# Altium PCB JTAG_to_HDMI.PcbDoc
Units mm, origin at the board's own origin, x right, y up, seen from the top; angles counter-clockwise.
Board outline 29.8 x 34.5 mm, 2 copper layers (Top Layer, Bottom Layer), stack 1.671 mm thick; 3 components, 7 nets, 47 pads, 0 vias.
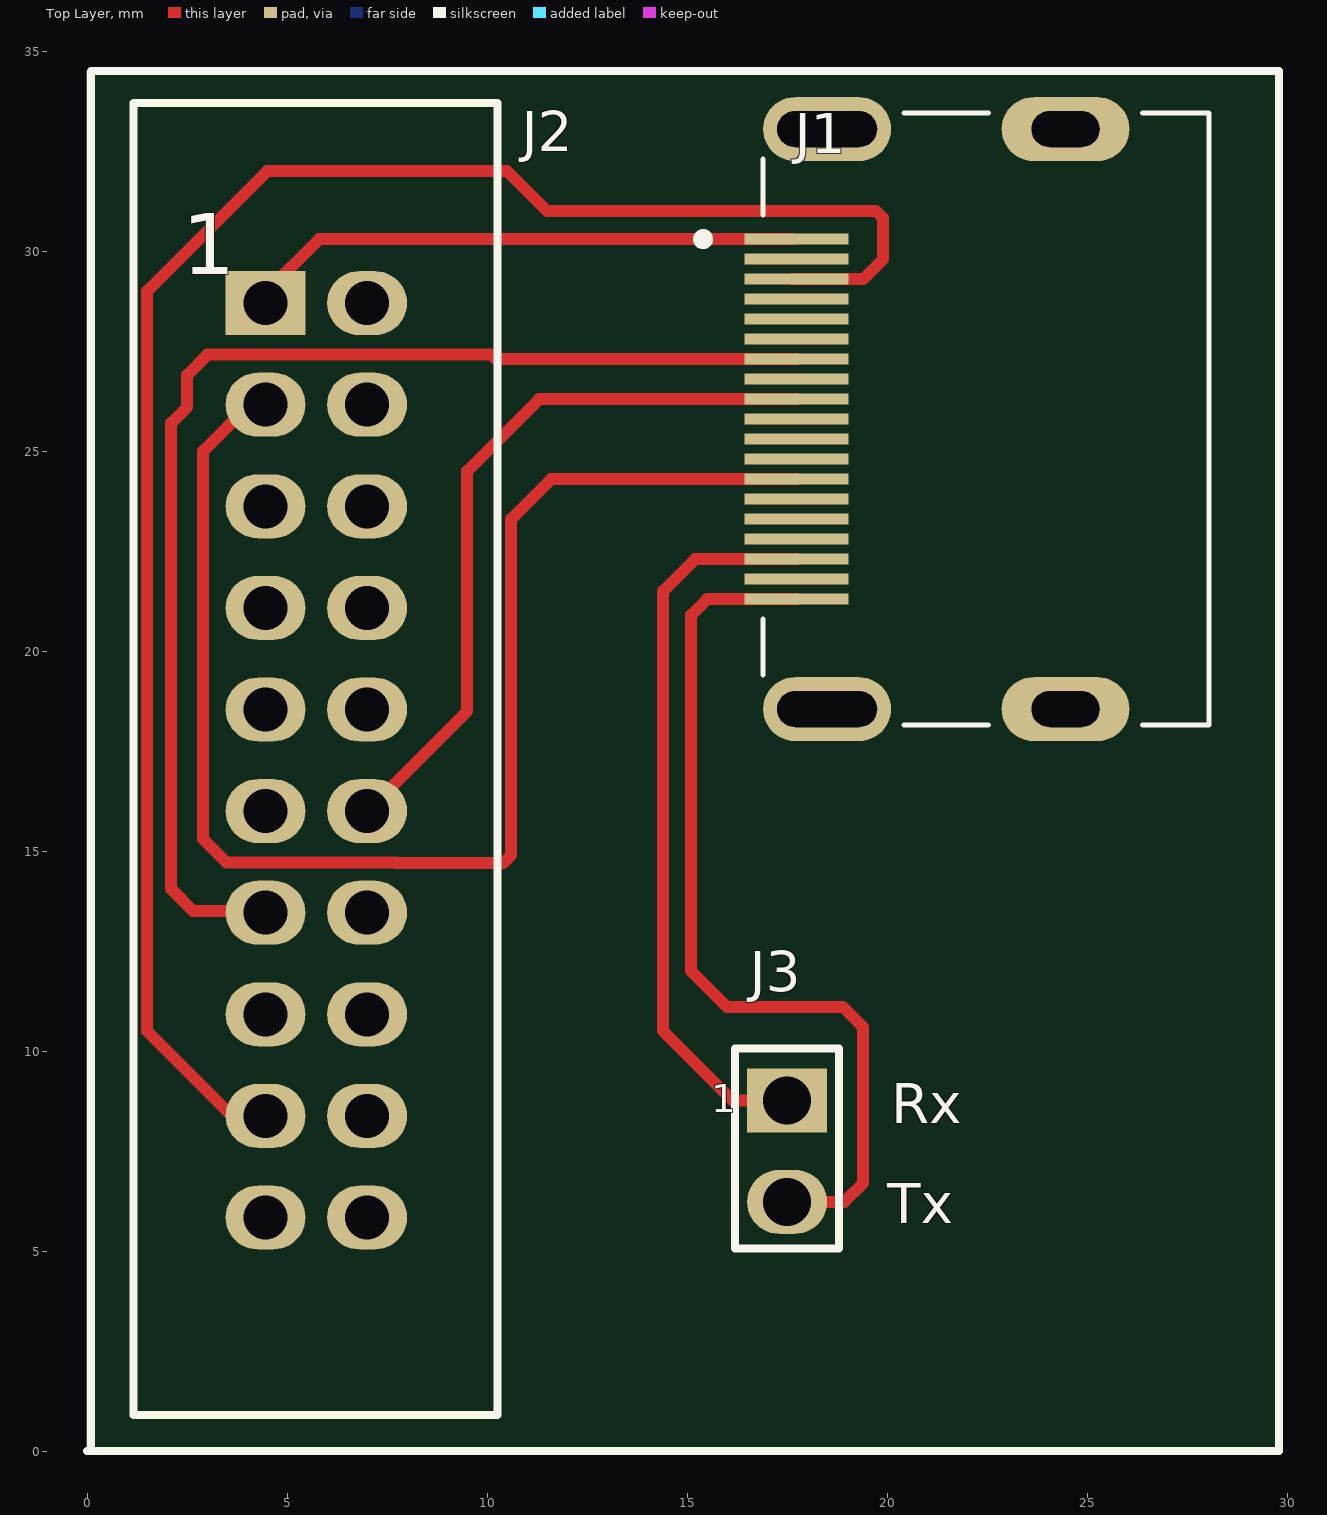
[diagram p0: Top Layer view]
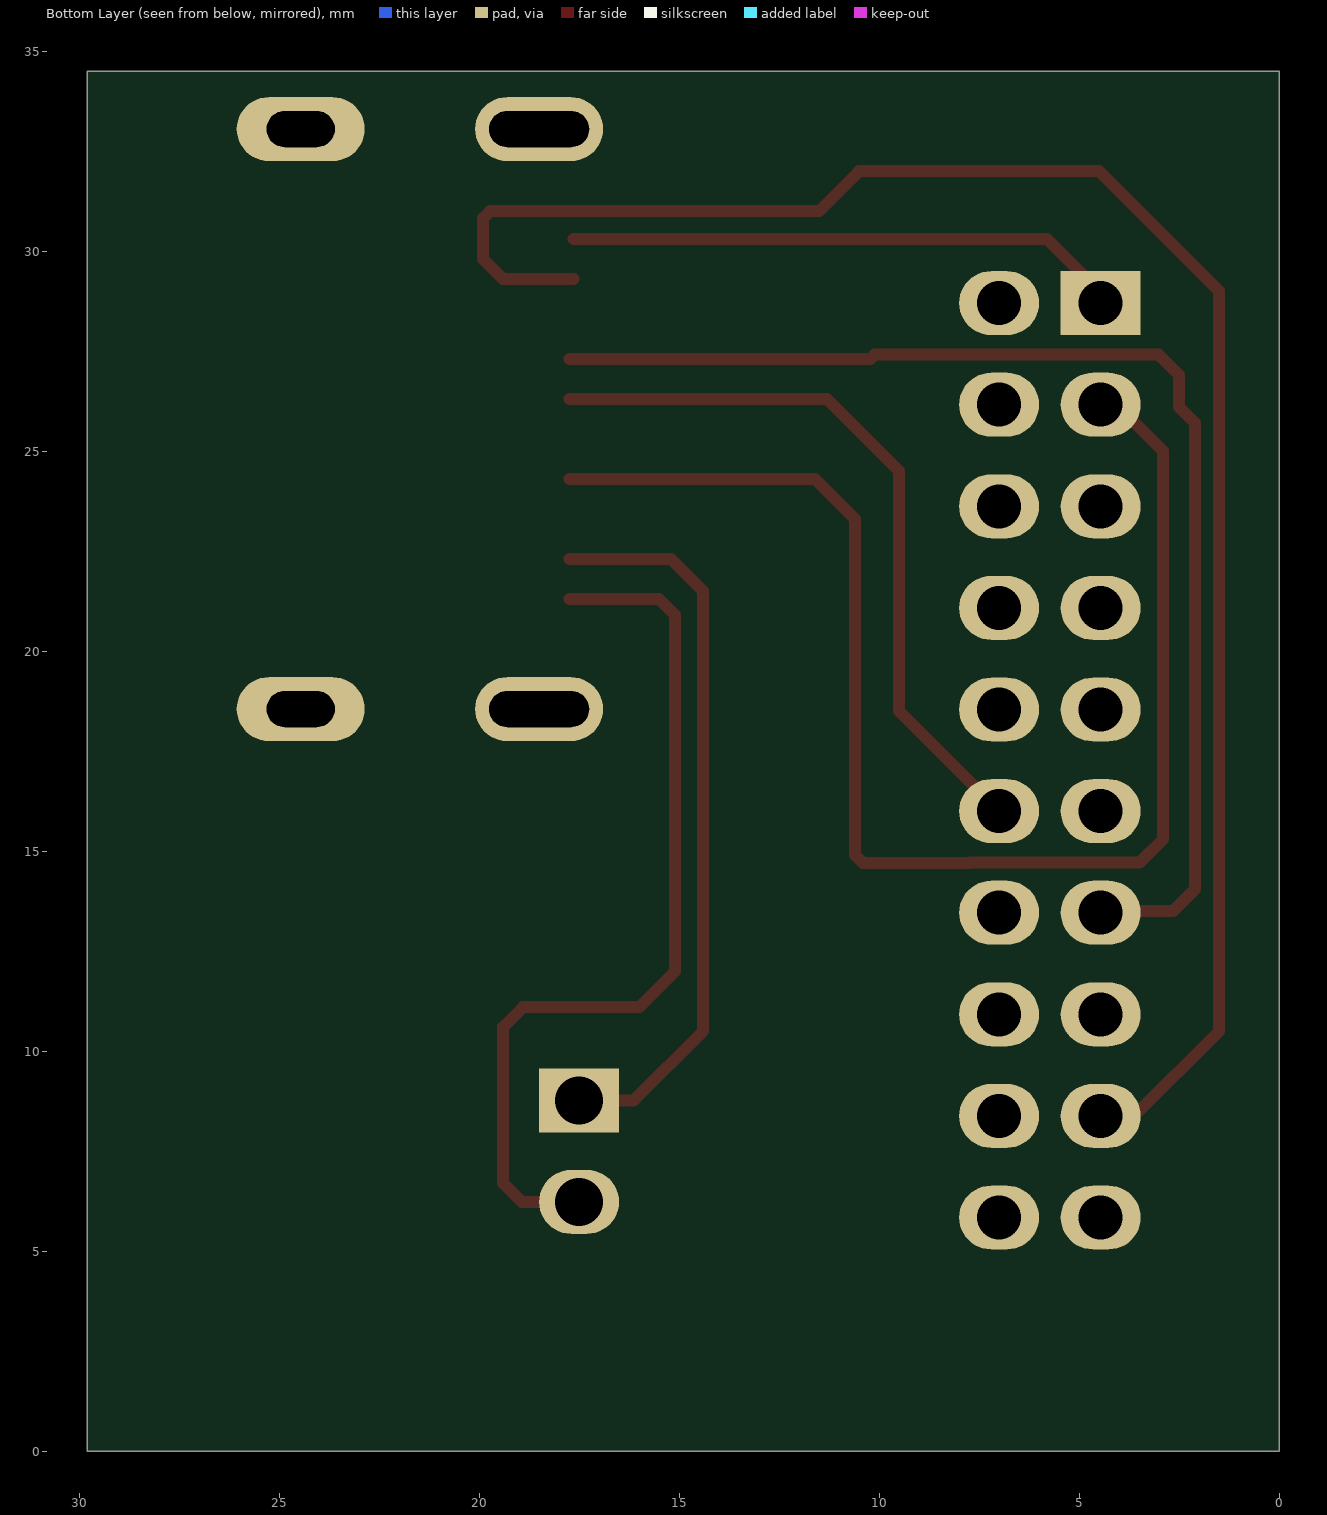
[diagram p1: Bottom Layer view, seen from below]

## Layer stack, top to bottom
Top Solder: solder mask 0.0102, Solder Resist, Dk 3.5
Top Layer: signal copper 0.0356
Dielectric 1: dielectric 1.6, FR-4, Dk 4.8
Bottom Layer: signal copper 0.0356
Bottom Solder: solder mask 0.0102, Solder Resist, Dk 3.5

## Board outline
0,0 29.8,0 29.8,34.5 0,34.5

## Design rules (kind name [scope] priority, off if disabled: settings)
Clearance [All] p1: gap=0.2 ignorepadtopadclearanceinfootprint=FALSE
HoleToHoleClearance [All] p1: gap=0 allowstackedmicrovias=TRUE
MinimumSolderMaskSliver [All] p1: minsoldermaskwidth=0.01
PolygonConnect [All] p1: connectstyle=Relief reliefconductorwidth=0.254 reliefentries=4 polygonreliefangle="90 Angle" airgapwidth=0.254
RoutingVias [All] p1: holewidth=0.3 width=0.6 viastyle="Through Hole" minholewidth=0.3 minwidth=0.6 maxholewidth=0.3 maxwidth=6
SilkToSilkClearance [All] p1: silktosilkclearance=0.2
SilkToSolderMaskClearance [IsPad] p1: minsilkscreentomaskgap=0 clearancetoexposedcopper=TRUE
SolderMaskExpansion [All] p1: expansion=0.102 istentingtop=FALSE
Width [All] p1: maxlimit=1 minlimit=0.3 preferedwidth=0.5
26 further rules are at their usual default settings.

## Components (designator, comment, footprint, x,y, rotation, side; value= is the part's Value field where it differs from the comment)
J1 "RAHHD19TR" SWITCHCRAFT_RAHHD19TR 21.1,25.8 r90 top
J2 "SBH11-PBPC-D10-ST-BK" SBH11-PBPC-D10-ST-BK 5.73,17.27 r0 top
J3 "1x2 Header" DS1021-1*2SF1-1 17.5,7.5 r0 top

## Footprints (in the part's own frame and the unit in brackets; to place one, negate y for a bottom-side part, rotate by r counter-clockwise, add the part's x,y. Pads: shape width x height; smd on the part's side, far side on the other; paste and mask are expansions set on the pad)
DS1021-1*2SF1-1 [mm]
  rect 2x1.6 hole 1.2: 1(0,1.27) 1(0,1.27)
  oval 2x1.6 hole 1.2: 2(0,-1.27) 2(0,-1.27)
  silkscreen extent -1.3,-2.43 1.3,2.57, body extent -1.17,-2.47 1.47,2.64, height 5.51
SBH11-PBPC-D10-ST-BK [mm]
  rect 2x1.6 hole 1.1: 1(-1.27,11.43)
  oval 2x1.6 hole 1.1: 2(-1.27,8.89) 3(-1.27,6.35) 4(-1.27,3.81) 5(-1.27,1.27) 6(-1.27,-1.27) 7(-1.27,-3.81) 8(-1.27,-6.35) 9(-1.27,-8.89) 10(-1.27,-11.43) 11(1.27,-11.43) 12(1.27,-8.89) 13(1.27,-6.35) 14(1.27,-3.81) 15(1.27,-1.27) 16(1.27,1.27) 17(1.27,3.81) 18(1.27,6.35) 19(1.27,8.89) 20(1.27,11.43)
  silkscreen extent -4.57,-16.37 4.53,16.43, body extent -4.75,-16.39 4.35,16.5, height 8.8
SWITCHCRAFT_RAHHD19TR [mm]
  rect 0.28x2.6 smd: 1(4.5,3.36) 2(4,3.36) 3(3.5,3.36) 4(3,3.36) 5(2.5,3.36) 6(2,3.36) 7(1.5,3.36) 8(1,3.36) 9(0.5,3.36) 10(0,3.36) 11(-0.5,3.36) 12(-1,3.36) 13(-1.5,3.36) 14(-2,3.36) 15(-2.5,3.36) 16(-3,3.36) 17(-3.5,3.36) 18(-4,3.36) 19(-4.5,3.36)
  oval 1.6x3.2 hole 0.9 slot 2.5 at 90 deg: SH1(-7.25,2.6) SH2(7.25,2.6)
  oval 1.6x3.2 hole 0.9 slot 1.7 at 90 deg: SH3(-7.25,-3.36) SH4(7.25,-3.36)
  silkscreen extent -7.65,-6.95 7.65,5.8, body extent -7.6,-7.97 7.7,4.17, height 6.17

## Part data
J1: "HDMI HDMI 2.0 Receptacle Connector 19 Position Surface Mount, Right Angle; Through Hole", Package=None, Availability="In Stock", Check_prices=https://www.snapeda.com/parts/RAHHD19TR/Switchcraft+%252F+Conxall/view-part/?ref=eda, MF="Switchcraft Inc.", MP=RAHHD19TR, Price=None, Purchase-URL=https://pricing.snapeda.com/search/part/RAHHD19TR/?ref=eda, SnapEDA_Link=https://www.snapeda.com/parts/RAHHD19TR/Switchcraft+%252F+Conxall/view-part/?ref=snap
J2: "Conn Shrouded Header (4 Sides) HDR 20 POS 2.54mm Solder ST Top Entry Thru-Hole", Manufacturer=Sullins, Supplier Part Number=S9172-ND, Category=Connectors, ComponentLink1Description=https://datasheet.ciiva.com/730/sbh11-pbpc-dxx-st-xx-730919.pdf?src-supplier=Digikey, ComponentLink1URL=https://datasheet.ciiva.com/730/sbh11-pbpc-dxx-st-xx-730919.pdf?src-supplier=Digikey, Manufacturer Part Number=SBH11-PBPC-D10-ST-BK, Pricing="1=0,65, 10=0,496, 80=0,38963, 440=0,32211, 945=0,29663, 4900=0,25024, 10000=0,2457 (USD)", RoHS=Yes, Stock=20189, Supplier=Digikey
J3: library part DS1021-1*2SF1-1, Manufacturer="Ningbo Connfly Electric", Supplier Part Number=1390105, Manufacturer Part Number=DS1021-1*2SF1-1, Pricing="1=0,11 (EUR)", RoHS=No, Supplier=Conrad

## Nets (pads, with @x,y where several pads share a name; then routed paths per layer and width w, separated by ;. In a path a pad name is that pad's centre, name@x,y a point inside that pad or via, vN(x,y) a via of type N, cw(c..) or ccw(c..) an arc to the next point about the centre after c; other vN are vias at no path point)
NetJ1_1: J1.1 J2.1 | length 14
  Top Layer w0.3: J2.1 4.46,28.96 5.8,30.3 J1.1@17.64,30.3
NetJ1_3: J1.3 J2.9 | length 46
  Top Layer w0.3: J2.9 3.62,8.38 1.5,10.5 1.5,29 4.5,32 10.5,32 11.5,31 19.724,31 19.9,30.824 19.9,29.8 19.4,29.3 J1.3 J1.3@17.64,29.3
NetJ1_7: J1.7 J2.7 | length 31.1
  Top Layer w0.3: J2.7 4.42,13.5 2.651,13.5 2.1,14.051 2.1,25.7 2.5,26.1 2.5,26.9 3.01,27.41 10.111,27.41 10.221,27.3 J1.7
NetJ1_9: J1.9 J2.15 | length 18.5
  Top Layer w0.3: J2.15 9.5,18.5 9.5,24.5 11.3,26.3 J1.9
NetJ1_13: J1.13 J2.2 | length 35.7
  Top Layer w0.3: J2.2 4.06,26.16 2.9,25 2.9,15.3 3.49,14.71 7.718,14.71 7.728,14.7 10.4,14.7 10.6,14.9 10.6,23.3 11.6,24.3 J1.13
NetJ1_17: J1.17 J3.1 | length 18.5
  Top Layer w0.3: J3.1@17.5,8.77 16.13,8.77 14.4,10.5 14.4,21.5 15.2,22.3 J1.17
NetJ1_19: J1.19 J3.2 | length 22.6
  Top Layer w0.3: J3.2@17.5,6.23 18.93,6.23 19.4,6.7 19.4,10.6 18.9,11.1 16,11.1 15.1,12 15.1,20.9 15.5,21.3 J1.19
pads on no net: J1.2 J1.4 J1.5 J1.6 J1.8 J1.10 J1.11 J1.12 J1.14 J1.15 J1.16 J1.18 J1.SH1 J1.SH2 J1.SH3 J1.SH4 J2.3 J2.4 J2.5 J2.6 J2.8 J2.10 J2.11 J2.12 J2.13 J2.14 J2.16 J2.17 J2.18 J2.19 J2.20

## Silkscreen, mask and mechanical layers (free items; w line width, h text height)
Top Overlay:
  lines w0.2: 0,0 29.8,0 29.8,34.5 0.1,34.5 0.1,0.1
  text "Rx" at 20.1,8.2 h1
  text "Tx" at 20,5.7 h1

## Text inside footprints (layer, text, board x,y; h text height)
J2: Top Overlay "1" at 2.384,29.424 h1.52
J3: Top Overlay "1" at 15.6,8.47 h0.7